# Altium PCB PCB1.PcbDoc
Units mm, origin at the board's own origin, x right, y up, seen from the top; angles counter-clockwise.
Board outline 95 x 95 mm, 2 copper layers (Top Layer, Bottom Layer); 46 components, 41 nets, 164 pads, 43 vias.
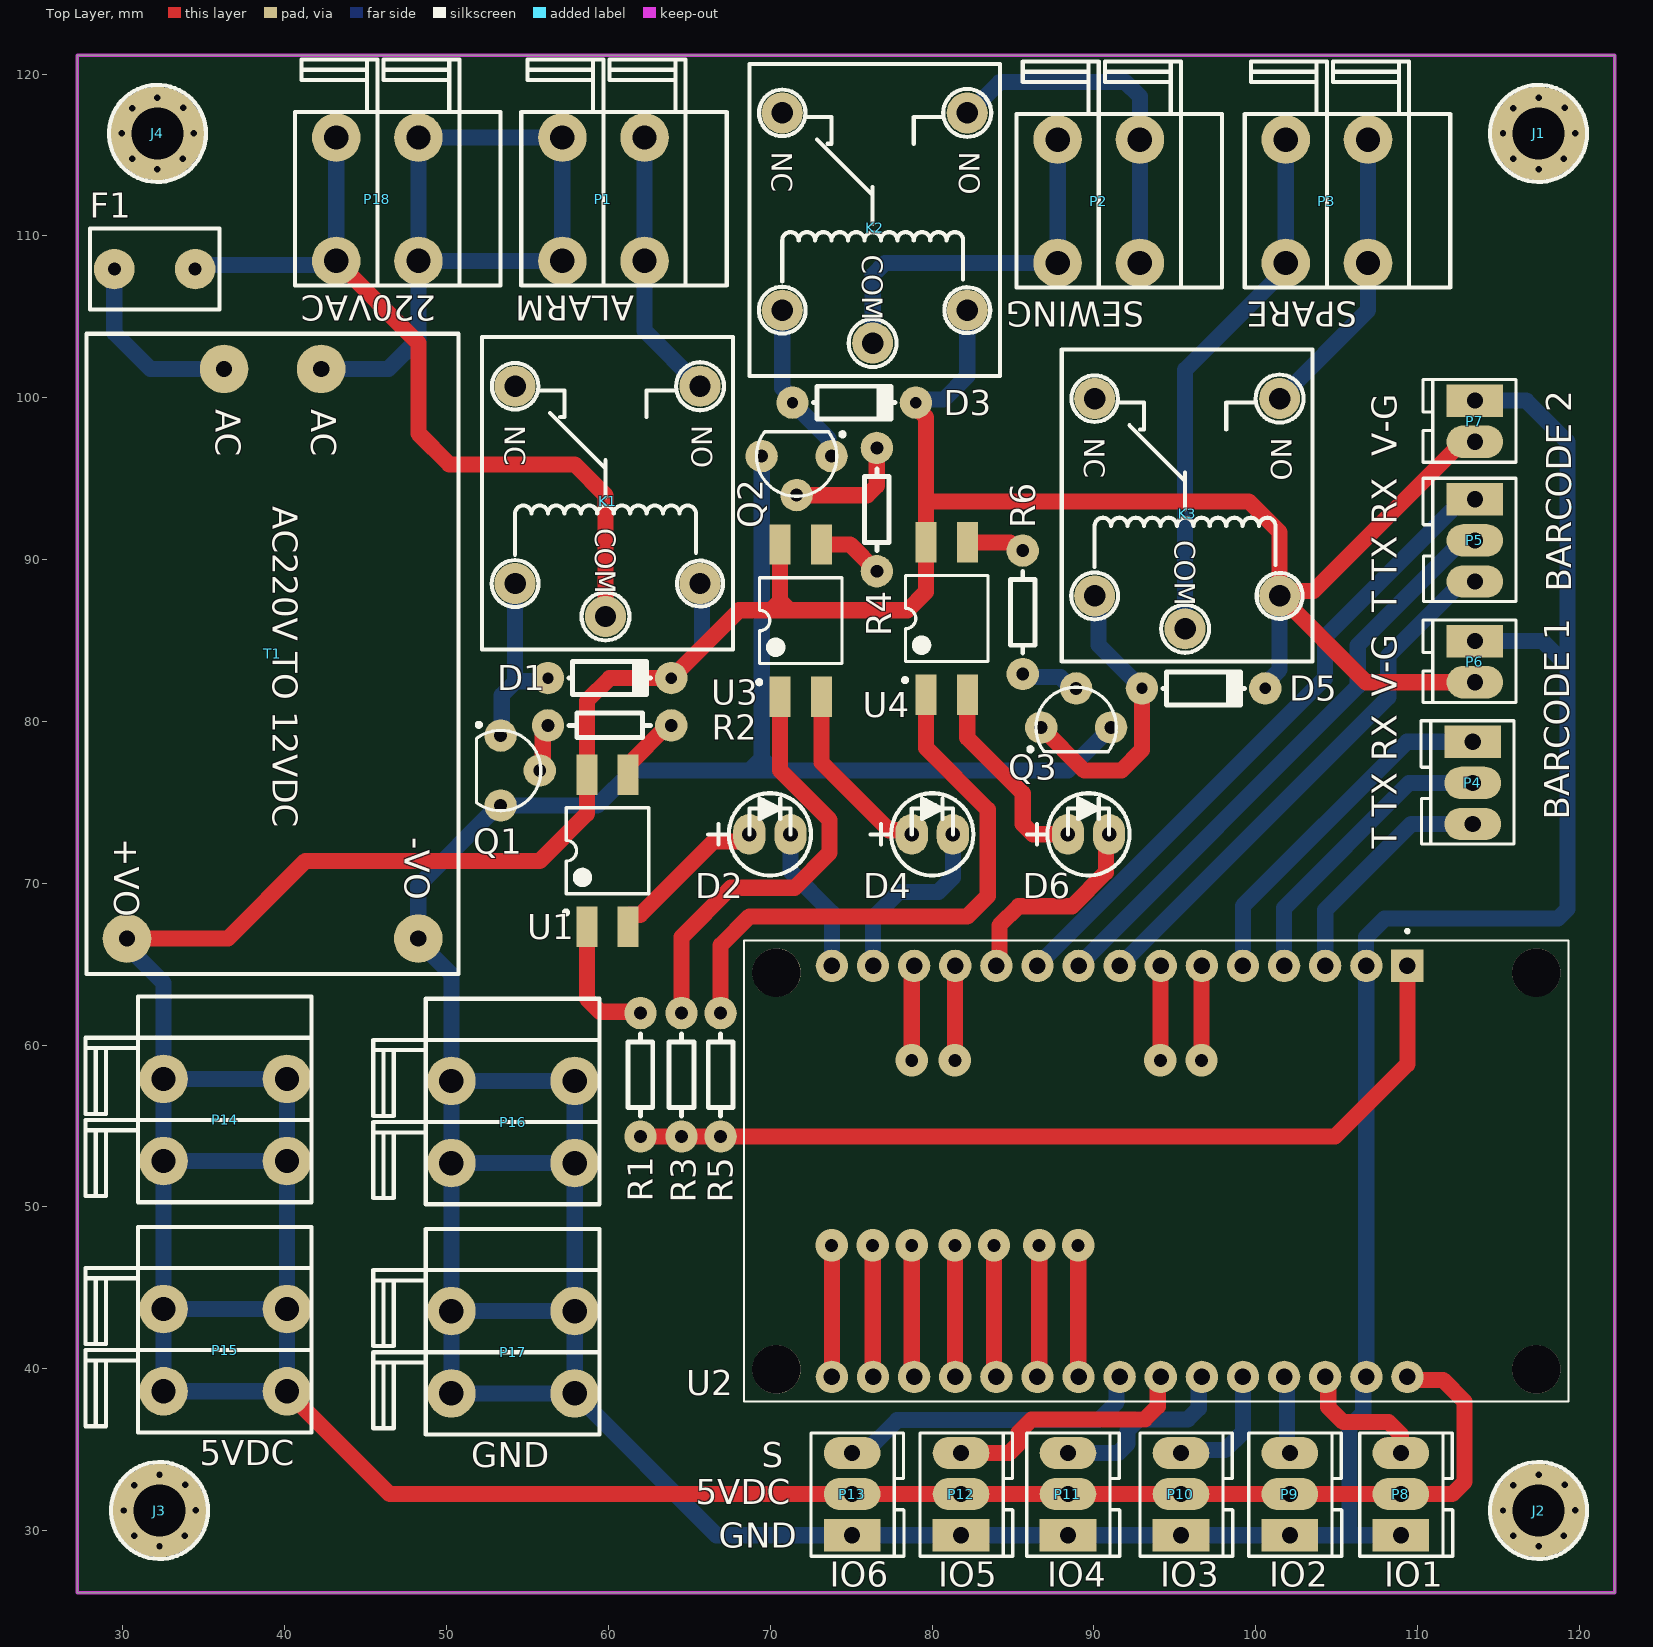
[diagram p0: Top Layer view]
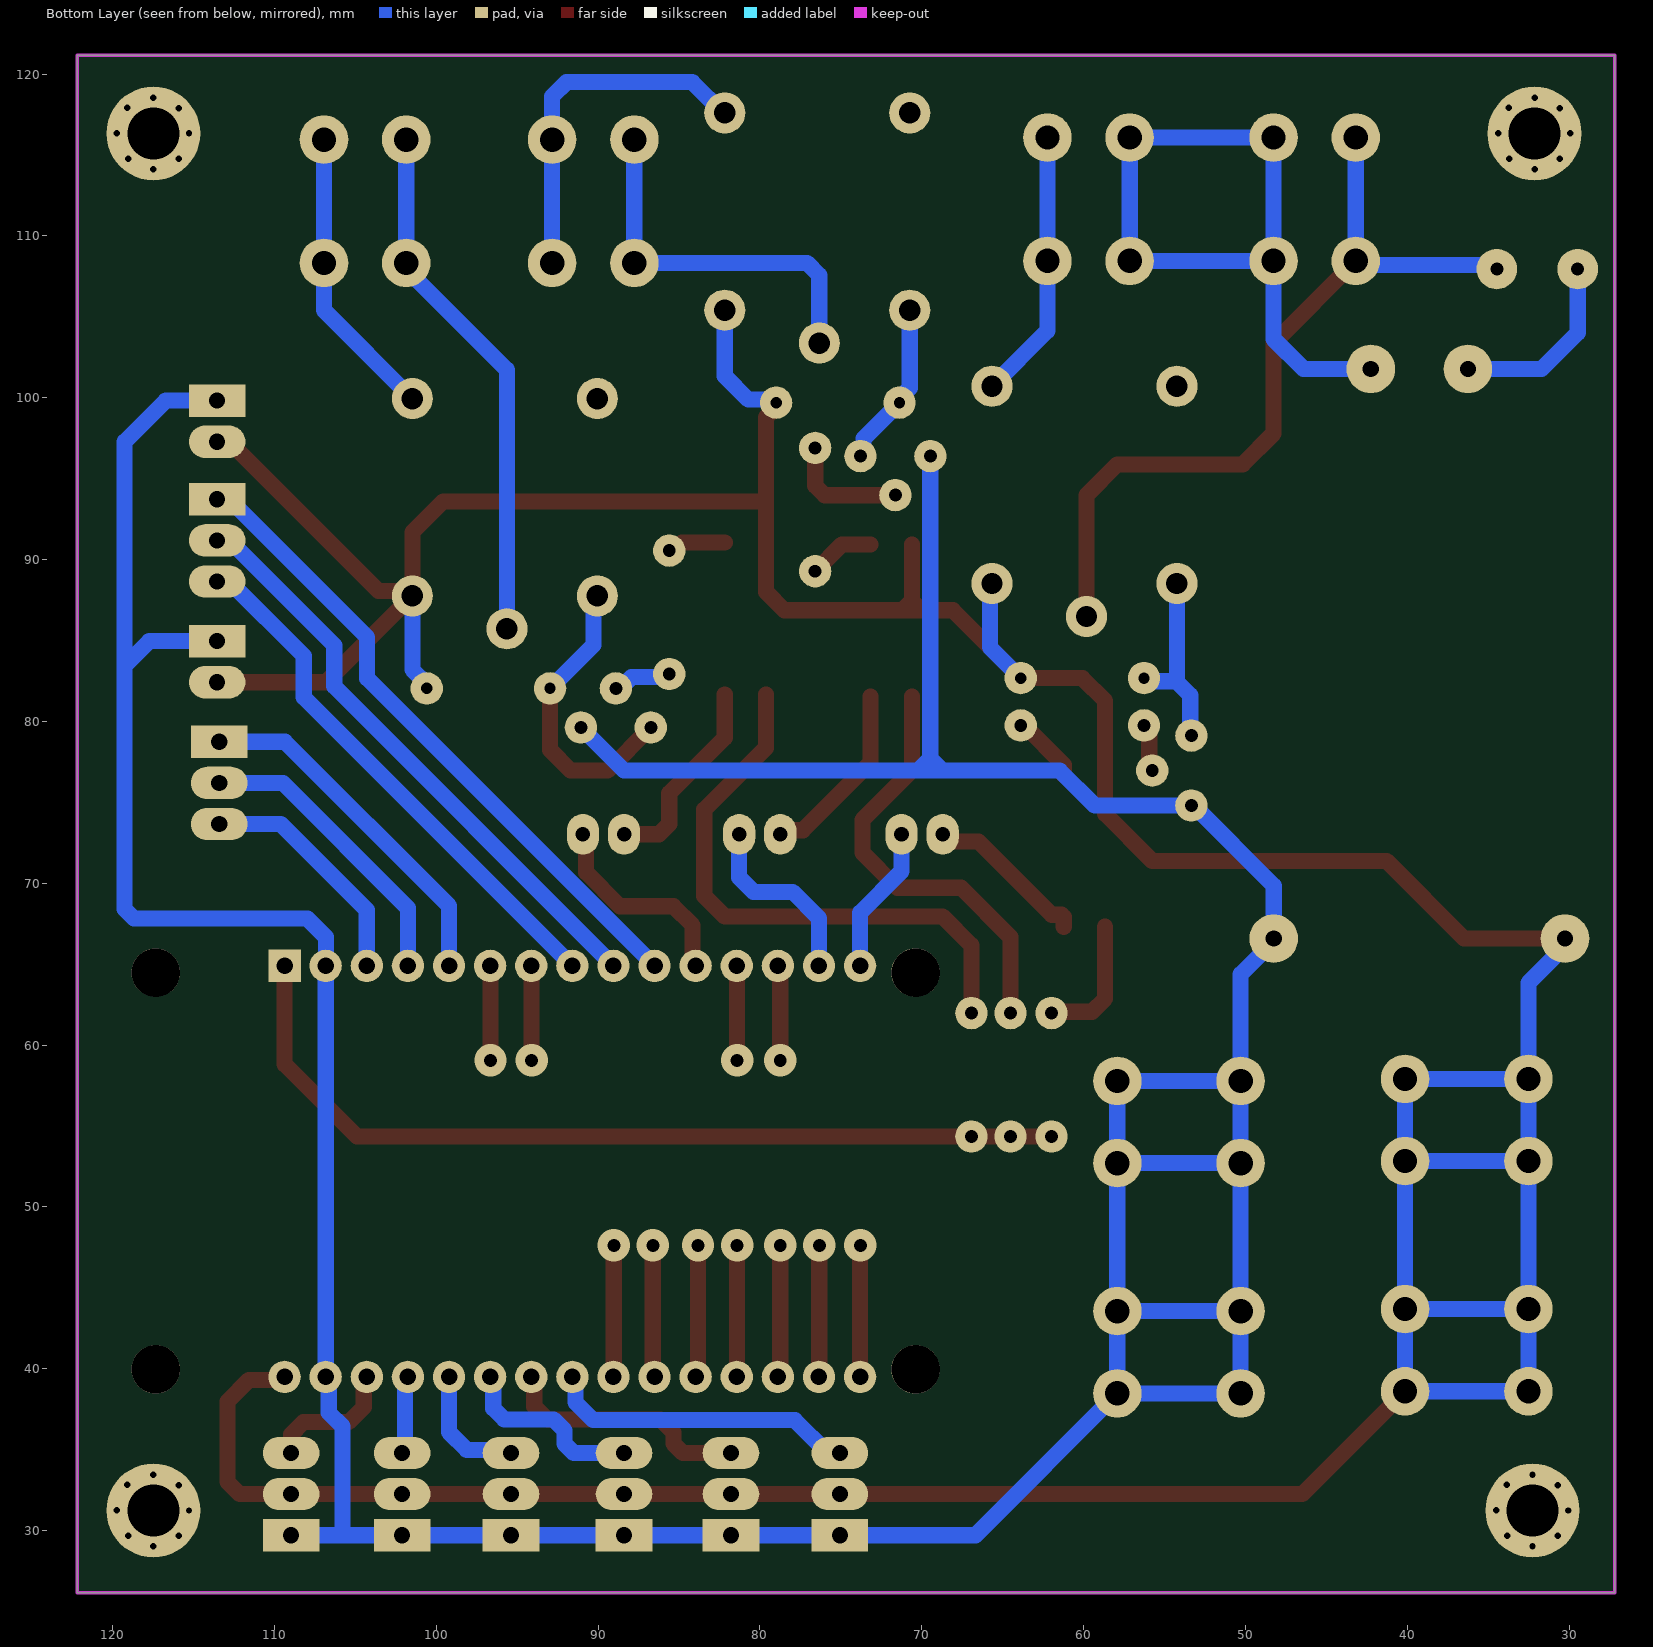
[diagram p1: Bottom Layer view, seen from below]
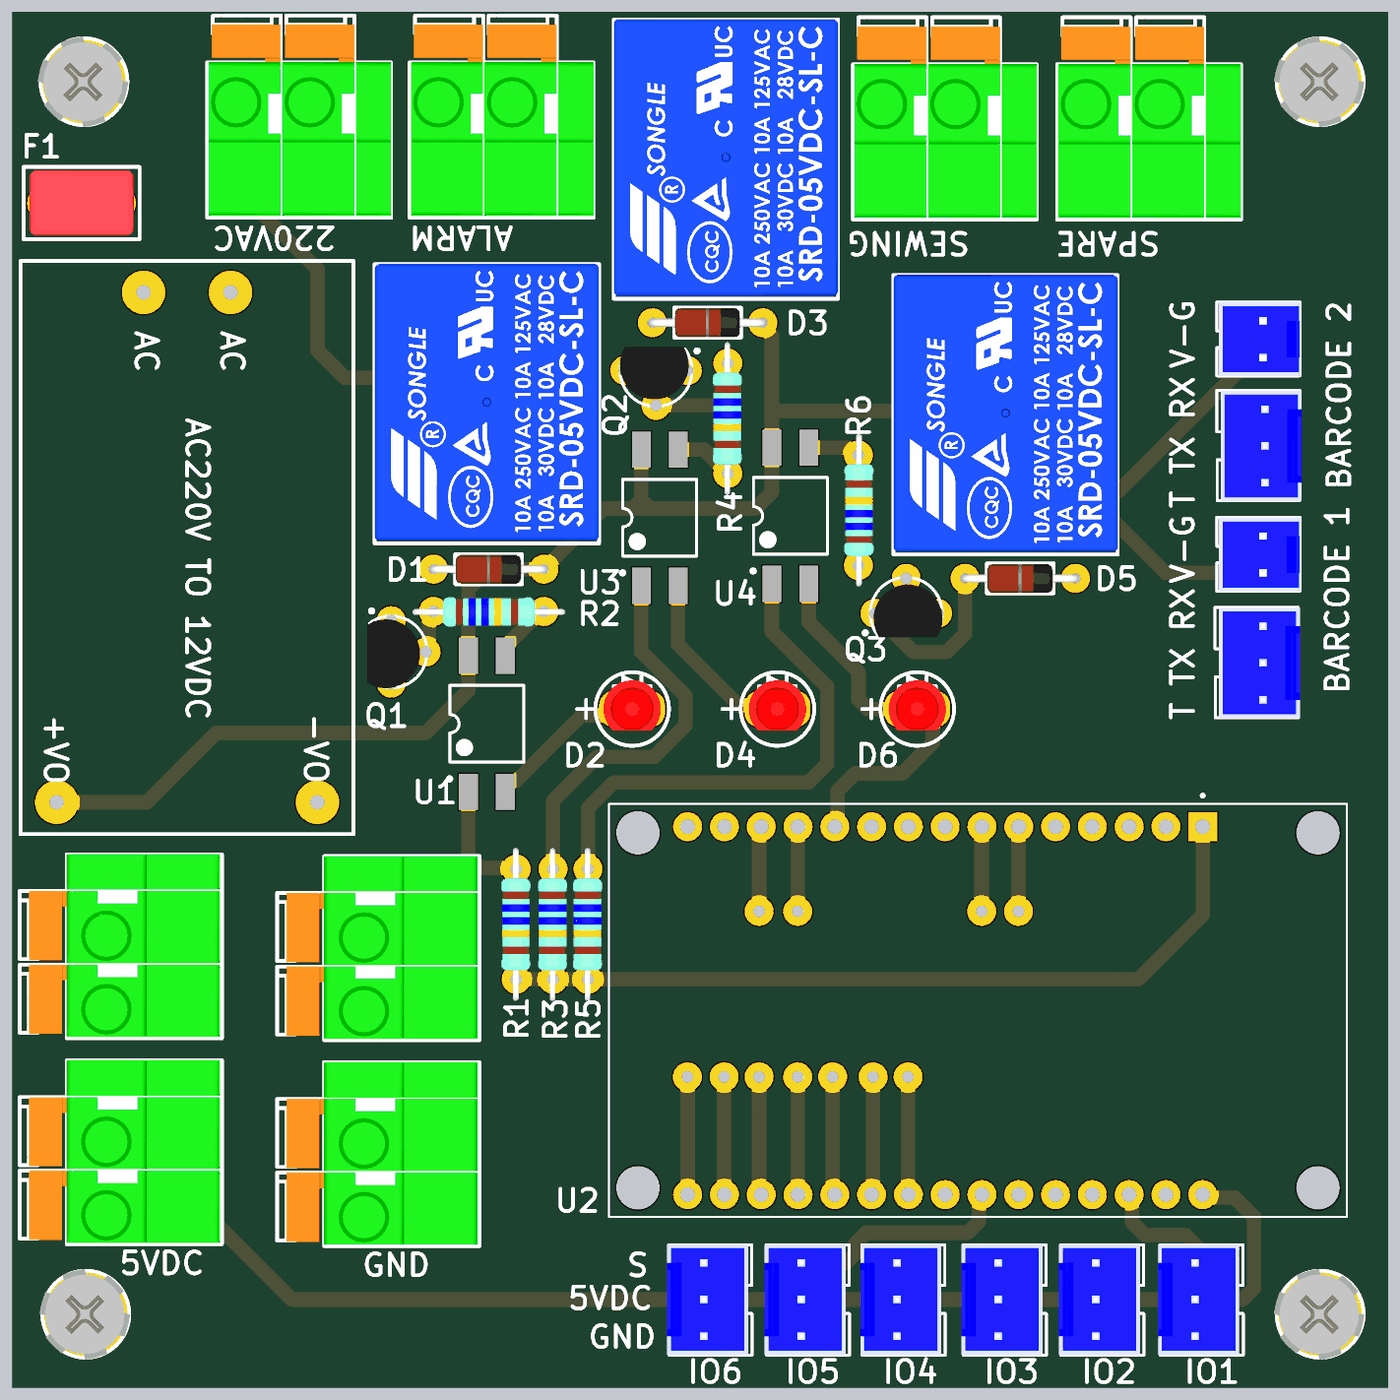
[diagram p2: 3D render of the assembled board from above, using the file's embedded part models]

## Layer stack, top to bottom
Top Solder: solder mask 0.0102, Solder Resist, Dk 3.5
Top Layer: signal copper 0.0356
Dielectric 1: dielectric 0.32, FR-4, Dk 4.8
Bottom Layer: signal copper 0.0356
Bottom Solder: solder mask 0.0102, Solder Resist, Dk 3.5

## Board outline
27.178,26.162 27.178,121.162 122.178,121.162 122.178,26.162

## Design rules (kind name [scope] priority, off if disabled: settings)
Clearance [All] p1: gap=0.254 ignorepadtopadclearanceinfootprint=FALSE except(0: Arc-Hole Track-Hole SMDPad-Hole THPad-Hole Via-Hole Fill-Hole Poly-Hole Region-Hole Text-Hole)
PolygonConnect [All] p1: connectstyle=Relief reliefconductorwidth=0.254 reliefentries=4 polygonreliefangle="90 Angle" airgapwidth=0.254
RoutingVias [All] p1: holewidth=0.711 width=1.27 viastyle="Through Hole" minholewidth=0.711 minwidth=1.27 maxholewidth=0.711 maxwidth=1.27
SolderMaskExpansion [All] p1: expansion=0.102 istentingtop=FALSE
Width [All] p1: maxlimit=1 minlimit=0.254 preferedwidth=0.6 minimp=50.000000 maximp=50.000000 favimp=50.000000
30 further rules are at their usual default settings.

## Components (designator, comment, footprint, x,y, rotation, side; value= is the part's Value field where it differs from the comment)
D1 "1N4148" D4148 56.261,82.677 r180 top
D2 "DO1" LED 69.977,73.025 r0 top
D3 "1N4148" D4148 71.374,99.695 r180 top
D4 "DO2" LED 80.01,73.025 r0 top
D5 "1N4148" D4148 92.964,82.042 r180 top
D6 "DO3" LED 89.662,73.025 r0 top
F1 "1A" CAP5W 34.464,107.92 r0 top
J1 "M3" PAD 117.475,116.332 r0 top
J2 "M3" PAD 117.475,31.242 r0 top
J3 "M3" PAD 32.258,31.242 r0 top
J4 "M3" PAD 32.131,116.332 r0 top
K1 "Relay" RELAY1CON_REV 59.817,86.487 r270 top
K2 "Relay" RELAY1CON_REV 76.327,103.378 r270 top
K3 "Relay" RELAY1CON_REV 95.631,85.725 r270 top
P1 "ALARM" KF142V-5.08-P2 62.23,116.078 r180 top
P2 "SEWING" KF142V-5.08-P2 92.837,115.951 r180 top
P3 "SPARE" KF142V-5.08-P2 106.934,115.951 r180 top
P4 "" CONNECT_2.54_(3) 113.411,78.74 r270 top
P5 "" CONNECT_2.54_(3) 113.538,93.726 r270 top
P6 "BARCODE1" CONNECT_2.54_(2) 113.538,84.963 r270 top
P7 "BARCODE2" CONNECT_2.54_(2) 113.538,99.822 r270 top
P8 "DI1" CONNECT_2.54_(3) 108.966,29.718 r90 top
P9 "DI1" CONNECT_2.54_(3) 102.108,29.718 r90 top
P10 "DI1" CONNECT_2.54_(3) 95.377,29.718 r90 top
P11 "DI1" CONNECT_2.54_(3) 88.392,29.718 r90 top
P12 "DI1" CONNECT_2.54_(3) 81.788,29.718 r90 top
P13 "DI1" CONNECT_2.54_(3) 75.057,29.718 r90 top
P14 "5VDC" KF142V-5.08-P2 32.512,57.912 r270 top
P15 "" KF142V-5.08-P2 32.512,43.688 r270 top
P16 "GND" KF142V-5.08-P2 50.292,57.785 r270 top
P17 "" KF142V-5.08-P2 50.292,43.561 r270 top
P18 "220VAC" KF142V-5.08-P2 48.26,116.078 r180 top
Q1 "BC547" TO-92 53.34,76.962 r180 top
Q2 "BC547" TO-92 71.628,96.393 r90 top
Q3 "BC547" TO-92 88.9,79.629 r270 top
R1 "100" R1/8 61.976,61.976 r270 top value=1K
R2 "500" R1/8 56.261,79.756 r0 top value=1K
R3 "100" R1/8 64.516,61.976 r270 top value=1K
R4 "500" R1/8 76.581,96.901 r270 top value=1K
R5 "100" R1/8 66.929,61.976 r270 top value=1K
R6 "500" R1/8 85.598,82.931 r90 top value=1K
T1 "AC-DC" AC-DC 39.243,84.582 r270 top
U1 "Optoisolator1" "DIP-4 - TOP" 59.944,72.009 r90 top
U2 "ESP32-DEVKIT-V1" ESP32_DEVKIT_V1 93.853,52.197 r270 top
U3 "Optoisolator1" "DIP-4 - TOP" 71.882,86.233 r90 top
U4 "Optoisolator1" "DIP-4 - TOP" 80.899,86.36 r90 top

## Footprints (in the part's own frame and the unit in brackets; to place one, negate y for a bottom-side part, rotate by r counter-clockwise, add the part's x,y. Pads: shape width x height; smd on the part's side, far side on the other; paste and mask are expansions set on the pad)
AC-DC [mm]
  round 3 hole 1: 1(-17.2,3.007) 2(-17.2,-2.993) 3(18,9.007) 4(18,-8.993)
  silkscreen extent -19.38,-11.5 20.2,11.5
CAP5W [mm]
  round 2.5 hole 0.8: 1(0,0.03) 2(-5,0.03)
  silkscreen extent -6.5,-2.47 1.5,2.53, body extent -6.1,-2.2 1.1,2.3, height 5.75
CONNECT_2.54_(2) [mm]
  rect 2x3.5 hole 1: 1(0,0)
  oval 2x3.5 hole 1: 2(2.54,0)
  silkscreen extent -1.3,-3.2 3.8,2.54, body extent -1.27,-3.05 3.81,2.54, height 10.26
CONNECT_2.54_(3) [mm]
  rect 2x3.5 hole 1: 1(0,0)
  oval 2x3.5 hole 1: 2(2.54,0) 3(5.08,0)
  silkscreen extent -1.3,-3.2 6.32,2.54, body extent -1.27,-2.92 6.35,2.67, height 12.04
D4148 [mm]
  round 2 hole 0.7: A(0,0) K(-7.62,0)
  silkscreen extent -6.32,-1.02 -1.3,1.02, body extent -7.88,-1 0.28,1, height 2.09
"DIP-4 - TOP" [mm] "DIP; 4 Leads; Row Spacing 7.62 mm; Pitch 2.54 mm"
  rect 2.5x1.3 smd: 1(-4.7,1.275) 2(-4.7,-1.275) 3(4.7,-1.275) 4(4.7,1.275)
  silkscreen extent -3.93,-2.55 2.65,2.69, body extent -3.15,-2.5 3.15,2.5, height 5.6
ESP32_DEVKIT_V1 [mm]
  rect 2x2 / inner round 2 / far side rect 2x2 hole 1.02: 1(-12.7,15.515)
  round 2 hole 1.02: 2(-12.7,12.975) 3(-12.7,10.435) 4(-12.7,7.895) 5(-12.7,5.355) 6(-12.7,2.815) 7(-12.7,0.275) 8(-12.7,-2.265) 9(-12.7,-4.805) 10(-12.7,-7.345) 11(-12.7,-9.885) 12(-12.7,-12.425) 13(-12.7,-14.965) 14(-12.7,-17.505) 15(-12.7,-20.045) 16(12.7,-20.045) 17(12.7,-17.505) 18(12.7,-14.965) 19(12.7,-12.425) 20(12.7,-9.885) 21(12.7,-7.345) 22(12.7,-4.805) 23(12.7,-2.265) 24(12.7,0.275) 25(12.7,2.815) 26(12.7,5.355) 27(12.7,7.895) 28(12.7,10.435) 29(12.7,12.975) 30(12.7,15.515)
  round 3 hole 3 unplated: ""(-12.28,23.475) ""(-12.28,-23.475) ""(12.23,23.475) ""(12.23,-23.475)
  silkscreen extent -14.95,-25.48 14.23,25.48
KF142V-5.08-P2 [mm]
  round 3 hole 1.5: 1(0,7.62) 1(0,0) 2(5.08,7.62) 2(5.08,0)
  silkscreen extent -5.08,-4.83 7.62,9.14, body extent -5.08,-4.18 7.52,9.02, height 14.1
LED [mm]
  oval 2x2.5 hole 0.9: 1(-1.27,0) 2(1.27,0)
  silkscreen extent -3.81,-2.54 2.54,2.54, body extent -1.99,-1.5 1.99,1.99, height 5.38
PAD [mm]
  round 5.8 hole 3.2: 0(0,0)
  silkscreen extent -3,-3 3,3, body extent -4.38,-4.32 4.25,4.31, height 1
R1/8 [mm]
  round 2 hole 0.8: 1(0,0) 2(7.62,0)
  silkscreen extent 1.3,-0.76 6.35,0.76, body extent -1.46,-1.05 9.11,0.98, height 2.29
RELAY1CON_REV [mil]
  round 100 hole 52: 1(0,0) 2(-560,-220) 3(-560,230) 4(-80,230) 5(-80,-220)
  silkscreen extent -679,-300 80,310, body extent -680,-300 72,310, height 606
TO-92 [mm]
  round 2 hole 0.8: 1(0,-2.159) 2(-2.413,0) 3(0,2.159)
  silkscreen extent -2.48,-2.95 1.5,2.48, body extent -2,-2.25 1.65,2.51, height 7.62

## Part data
D1 D3 D5: library part Diode, "Default Diode", Code_JEDEC=DO-214-AB, LatestRevisionDate=17-Jul-2002, LatestRevisionNote="Re-released for DXP Platform.", PackageDescription="DO-214-AB/SMC; 2 C-Bend Leads; Body 7.9 x 5.9 mm, inc. leads (LxW)", PackageReference=SMC, PackageVersion=Sep-1996, Published=8-Jun-2000, Publisher="Altium Limited"
D2 D4 D6: library part LED0, "Typical INFRARED GaAs LED", LatestRevisionDate=08-Jul-2005, LatestRevisionNote="Mech Layer 1 removed.", PackageDescription="LED; 2 Leads", PackageReference=LED-0, Published=8-Jun-2000, Publisher="Altium Limited"
F1: library part "Fuse 2", "Fuse", LatestRevisionDate=17-Jul-2002, LatestRevisionNote="Re-released for DXP Platform.", PackageDescription="Thru-Hole; 2 Leads", PackageReference=PIN-W2/E2.8, Published=8-Jun-2000, Publisher="Altium Limited"
J1 J2 J3 J4: library part Socket, "Socket", LatestRevisionDate=17-Jul-2002, LatestRevisionNote="Re-released for DXP Platform.", Publisher="Altium Limited"
K1 K2 K3: "SPDT Relay", LatestRevisionDate=17-Jul-2002, LatestRevisionNote="Re-released for DXP Platform.", PackageReference=MODULE5B, Published=8-Jun-2000, Publisher="Altium Limited"
P1 P2 P3 P6 P7 P14 P15 P16 P17 P18: library part "Header 2", "Header, 2-Pin", LatestRevisionDate=17-Jul-2002, LatestRevisionNote="Re-released for DXP Platform.", Publisher="Altium Limited"
P4 P5 P8 P9 P10 P11 P12 P13: library part "Header 3", "Header, 3-Pin", LatestRevisionDate=17-Jul-2002, LatestRevisionNote="Re-released for DXP Platform.", Publisher="Altium Limited"
Q1 Q2 Q3: library part 2N3904, "NPN General Purpose Amplifier", ComponentLink1Description="Manufacturer Link", ComponentLink1URL=http://www.fairchildsemi.com/, ComponentLink2Description=Datasheet, ComponentLink2URL=http://www.fairchildsemi.com/ds/2N%2F2N3904.pdf, DatasheetVersion=1997, LatestRevisionDate=15-Jan-2003, LatestRevisionNote="PCB Footprint 'BCY-W3/D4.7' replaced", PackageDescription="TO, Flat Index; 3 In-Line, Axial Leads; Body Dia. 4.5mm; Leads 0.51 x 0.48 mm (max)", PackageReference=TO-92A, PackageVersion=Sep-1998, Published=8-Jun-2000, Publisher="Altium Limited"
R1 R2 R3 R4 R5 R6: library part Res1, "Resistor", LatestRevisionDate=17-Jul-2002, LatestRevisionNote="Re-released for DXP Platform.", PackageDescription="Axial Device, Thru-Hole; 2 Leads; 0.3 in Pin Spacing", PackageReference=AXIAL-0.3, Published=8-Jun-2000, Publisher="Altium Limited"
T1: library part Trans, "Transformer", LatestRevisionDate=08-Jul-2005, LatestRevisionNote="Mech Layer 1 removed.", PackageDescription="Transformer; 4 Leads", PackageReference=TRANS, Published=24-Mar-1999, Publisher="Altium Limited"
U1 U3 U4: "4-Pin Phototransistor Optocoupler", DatasheetVersion=Nov-2003, LatestRevisionDate=04-Mar-2005, LatestRevisionNote="Sch pins 3 & 4 Swapped.", PackageReference=DIP-4, Published=24-Mar-1999, Publisher="Altium Limited"
U2: "Dual core, Wi-Fi: 2.4 GHz up to 150 Mbits/s,BLE (Bluetooth Low Energy) and legacy Bluetooth, 32 bits, Up to 240 MHz"

## Via types
v1: diameter 1, hole 0.4, Top Layer to Bottom Layer, 32 vias
v2: diameter 2, hole 0.8, Top Layer to Bottom Layer, 11 vias

## Nets (pads, with @x,y where several pads share a name; then routed paths per layer and width w, separated by ;. In a path a pad name is that pad's centre, name@x,y a point inside that pad or via, vN(x,y) a via of type N, cw(c..) or ccw(c..) an arc to the next point about the centre after c; other vN are vias at no path point)
3V3: R1.2 R3.2 R5.2 U2.1 | length 55.3
  Top Layer w1: R1.2 R3.2 R5.2 104.902,54.356 109.368,58.822 U2.1
5V: D1.K D3.K D5.K K1.4 K2.4 K3.4 P6.2 P7.2 P8.2 P9.2 P10.2 P11.2 P12.2 P13.2 P14.1 P14.2 P15.1 P15.2 T1.4 U1.4 U2.30 U3.4 U4.4 | length 320.5
  Top Layer w1: T1.4 36.483,66.582 41.275,71.374 55.753,71.374 58.669,74.29 58.669,81.275 60.071,82.677 D1.K 68.072,86.868 70.021,86.868 ; P15.2@40.132,38.608 46.482,32.258 P13.2 P12.2 P11.2 P10.2 P9.2 P8.2 112.141,32.258 112.903,33.02 112.903,37.973 111.57,39.306 109.559,39.306 U2.30 ; U3.4 70.607,87.454 ; D3.K 78.994,99.424 79.624,98.794 79.624,93.599 ; P6.2 106.807,82.423 K3.4 ; P7.2 112.788,97.282 103.558,88.052 101.768,88.052 K3.4 ; 70.021,86.868 71.193,86.868 ; 70.021,86.868 70.607,87.454 ; 70.607,87.454 71.193,86.868 ; 71.193,86.868 78.486,86.868 79.624,88.006 U4.4 79.624,93.599 ; 79.624,93.599 99.568,93.599 101.473,91.694 K3.4
  Bottom Layer w1: T1.4 30.25,66.099 32.512,63.836 P14.1@32.512,57.912 ; D1.K 65.786,84.582 65.786,88.392 K1.4 ; D3.K 79.185,99.886 80.709,99.886 82.169,101.346 K2.4 ; D5.K 100.584,82.313 101.473,83.202 K3.4 ; P15.1@32.512,43.688 P15.1@40.132,43.688 ; P15.1@32.512,43.688 P14.2@32.512,52.832 ; P15.1@32.512,43.688 32.512,38.608 40.132,38.608 P15.1@40.132,43.688 ; P14.2@32.512,52.832 P14.2@40.132,52.832 ; P14.2@32.512,52.832 P14.1@32.512,57.912 ; P14.1@32.512,57.912 40.132,57.912 P14.2@40.132,52.832 ; P15.1@40.132,43.688 P14.2@40.132,52.832
alarm: D2.2 U2.15 | length 9.2
  Bottom Layer w1: D2.2 71.247,70.739 73.808,68.178 U2.15
cutoff_sewing: D4.2 U2.14 | length 11.6
  Bottom Layer w1: U2.14 76.348,67.839 77.978,69.469 80.391,69.469 81.28,70.358 D4.2
DO_SPARE: D6.2 U2.11 | length 12.9
  Top Layer w1: U2.11 84.159,65.088 84.159,67.395 85.344,68.58 88.646,68.58 90.741,70.675 90.741,72.834 D6.2
GND: P6.1 P7.1 P8.1 P9.1 P10.1 P11.1 P12.1 P13.1 P16.1 P16.2 P17.1 P17.2 Q1.3 Q2.3 Q3.3 T1.3 U2.2 U2.29 | length 296.9
  Bottom Layer w1: Q2.3 69.469,77.724 ; Q3.3 88.392,76.962 70.231,76.962 ; P8.1 105.791,29.718 ; P6.1 117.729,84.963 119.253,83.439 ; P7.1 116.713,99.822 119.253,97.282 119.253,83.439 ; P17.1@50.292,43.561 P17.1@57.912,43.561 ; P17.1@50.292,43.561 P16.2@50.292,52.705 ; P17.1@50.292,43.561 50.292,38.481 P17.2@57.912,38.481 ; P16.2@50.292,52.705 P16.2@57.912,52.705 ; P16.2@50.292,52.705 P16.1@50.292,57.785 ; P16.1@50.292,57.785 57.912,57.785 P16.2@57.912,52.705 ; P16.1@50.292,57.785 50.292,64.382 48.25,66.424 T1.3 48.25,69.85 53.203,74.803 Q1.3 59.309,74.803 61.468,76.962 68.707,76.962 ; P17.2@57.912,38.481 66.675,29.718 P13.1 P12.1 P11.1 P10.1 P9.1 105.791,29.718 ; P17.2@57.912,38.481 P17.1@57.912,43.561 ; P17.1@57.912,43.561 P16.2@57.912,52.705 ; 68.707,76.962 70.231,76.962 ; 68.707,76.962 69.469,77.724 ; 69.469,77.724 70.231,76.962 ; 105.791,29.718 105.791,36.449 106.637,37.295 106.637,39.306 U2.29 U2.2 106.807,64.918 106.807,66.675 107.95,67.818 118.667,67.818 119.253,68.404 119.253,83.439
IO1: P8.3 U2.28 | length 9.5
  Top Layer w1: U2.28 104.479,39.306 104.479,37.634 105.41,36.703 108.204,36.703 108.966,35.941 108.966,35.052 109.093,34.925 P8.3 108.487,34.798 P8.3@108.025,35.26
IO2: P9.3 U2.27 | length 4.8
  Bottom Layer w1: U2.27 101.928,39.317 101.928,34.978 P9.3
IO3: P10.3 U2.26 | length 7.8
  Bottom Layer w1: P10.3 95.568,34.989 98.108,34.989 99.208,36.089 U2.26
IO4: P11.3 U2.25 | length 11.7
  Bottom Layer w1: P11.3 91.504,34.798 92.075,35.369 92.075,36.195 92.752,36.872 95.8,36.872 96.477,37.549 96.477,39.306 U2.25
IO5: P12.3 U2.24 | length 15.6
  Top Layer w1: P12.3 84.758,34.798 85.344,35.384 85.344,36.068 86.148,36.872 93.133,36.872 93.937,37.676 93.937,39.306 U2.24
IO6: P13.3 U2.23 | length 19.3
  Bottom Layer w1: P13.3 75.807,34.798 77.839,36.83 90.297,36.83 91.397,37.93 91.397,39.306 U2.23
L: F1.1 K1.1 P18.2 | length 49.9
  Top Layer w1: P18.2@43.18,108.458 48.26,103.378 48.26,97.79 50.165,95.885 57.912,95.885 59.817,93.98 K1.1
  Bottom Layer w1: F1.1 34.718,108.204 42.926,108.204 43.18,108.458 P18.2@43.18,116.078
N: P1.2 P18.1 T1.1 | length 44.6
  Bottom Layer w1: T1.1 46.41,101.782 48.26,103.632 P18.1@48.26,108.458 ; P18.1@48.26,108.458 57.15,108.458 57.15,116.078 48.26,116.078 P18.1@48.26,108.458
NetD1_A: D1.A K1.5 Q1.1 | length 12.2
  Bottom Layer w1: Q1.1 53.41,79.191 53.41,81.621 54.229,82.44 ; K1.5 54.229,82.44 ; D1.A@55.99,82.677 D1.A 56.07,82.486 54.275,82.486 54.229,82.44
NetD2_1: D2.1 U1.2 | length 10.2
  Top Layer w1: U1.2 61.219,67.909 61.369,68.059 61.969,68.059 66.494,72.584 68.266,72.584 D2.1
NetD3_A: D3.A K2.5 Q2.1 | length 10.3
  Bottom Layer w1: K2.5 70.739,100.601 71.374,99.966 D3.A 73.596,97.473 73.596,96.584 Q2.1
NetD4_1: D4.1 U3.2 | length 11.5
  Top Layer w1: U3.2 73.157,77.465 77.343,73.279 78.486,73.279 D4.1
NetD5_A: D5.A K3.5 Q3.1 | length 18.6
  Top Layer w1: Q3.1 89.408,76.962 91.694,76.962 92.964,78.232 D5.A
  Bottom Layer w1: K3.5 90.29,87.51 90.29,84.716 D5.A
NetD6_1: D6.1 U4.2 | length 13.1
  Top Layer w1: U4.2 82.174,78.989 85.598,75.565 85.598,73.66 86.233,73.025 D6.1 D6.1@87.951,73.466
NetF1_2: F1.2 T1.2 | length 11.6
  Bottom Layer w1: F1.2 29.464,104.013 31.695,101.782 T1.2
NetK1_3: K1.3 P1.1 | length 16.8
  Bottom Layer w1: P1.1@62.23,116.078 62.23,108.458 62.23,104.14 K1.3
NetK2_1: K2.1 P2.2 | length 23.6
  Bottom Layer w1: K2.1 76.327,107.569 77.089,108.331 87.757,108.331 P2.2@87.757,115.951
NetK2_3: K2.3 P2.1 | length 22.1
  Bottom Layer w1: K2.3 82.276,117.602 84.181,119.507 91.948,119.507 92.837,118.618 92.837,115.951 P2.1@92.837,108.331
NetK3_1: K3.1 P3.2 | length 32.8
  Bottom Layer w1: K3.1 95.631,101.727 101.854,107.95 101.854,108.331 P3.2@101.854,115.951
NetK3_3: K3.3 P3.1 | length 18.3
  Bottom Layer w1: K3.3 106.934,105.41 106.934,108.331 P3.1@106.934,115.951
NetQ1_2: Q1.2 R2.1 | length 3
  Top Layer w1: Q1.2 55.944,77.153 55.944,79.169 56.261,79.485 R2.1
NetQ2_2: Q2.2 R4.1 | length 7.5
  Top Layer w1: Q2.2 75.995,93.98 76.581,94.566 R4.1
NetQ3_2: Q3.2 R6.1 | length 3.7
  Bottom Layer w1: R6.1 85.789,82.74 87.932,82.74 88.629,82.042 Q3.2
NetR1_1: R1.1 U1.1 | length 8.1
  Top Layer w1: U1.1 58.669,62.87 59.476,62.063 61.889,62.063 R1.1
NetR2_2: R2.2 U1.3 | length 4.3
  Top Layer w1: U1.3 61.219,77.309 63.666,79.756 R2.2
NetR3_1: R3.1 U3.1 | length 26.9
  Top Layer w1: R3.1 64.516,66.675 67.564,69.723 71.501,69.723 73.66,71.882 73.66,73.914 70.607,76.967 U3.1
NetR4_2: R4.2 U3.3 | length 4.1
  Top Layer w1: U3.3 74.929,90.933 R4.2
NetR5_1: R5.1 U4.1 | length 36
  Top Layer w1: R5.1 66.929,66.167 68.707,67.945 82.169,67.945 83.439,69.215 83.439,74.549 79.624,78.364 U4.1
NetR6_2: R6.2 U4.3 | length 3.6
  Top Layer w1: U4.3 84.818,91.06 85.327,90.551 R6.2
RX_BAR1: P4.1 U2.5 | length 22.1
  Bottom Layer w1: U2.5 99.208,68.601 109.347,78.74 P4.1
RX_BAR2: P5.1 U2.10 | length 40.5
  Bottom Layer w1: U2.10 104.267,82.656 104.267,85.205 112.788,93.726 P5.1
trig_barcode1: P4.3 U2.3 | length 14.8
  Bottom Layer w1: U2.3 104.288,68.347 109.601,73.66 P4.3
trig_barcode2: P5.3 U2.8 | length 33.3
  Bottom Layer w1: U2.8 108.188,81.497 108.188,84.046 112.788,88.646 P5.3
TX_BAR1: P4.2 U2.4 | length 18.4
  Bottom Layer w1: U2.4 101.748,68.474 109.474,76.2 P4.2
TX_BAR2: P5.2 U2.9 | length 36.9
  Bottom Layer w1: U2.9 89.048,64.918 106.299,82.169 106.299,84.697 112.788,91.186 P5.2
pads on no net: J1.0 J2.0 J3.0 J4.0 K1.2 K2.2 K3.2 U2. U2.6 U2.7 U2.12 U2.13 U2.16 U2.17 U2.18 U2.19 U2.20 U2.21 U2.22
copper on no net: | length 81.1
  Top Layer w1: 73.787,39.73 73.914,39.603 73.808,39.497 73.808,47.604 v2(73.787,47.625) ; v2(76.327,47.625) 76.327,39.518 76.348,39.497 76.454,39.603 ; v2(78.74,47.625) 78.74,39.645 78.888,39.497 78.867,39.518 ; v2(78.74,59.055) 78.74,64.749 78.888,64.897 ; v2(81.407,47.625) 81.407,39.518 81.428,39.497 ; v2(81.407,59.055) 81.407,64.876 81.428,64.897 ; v2(83.82,47.625) 83.82,39.645 83.968,39.497 ; 86.508,39.497 86.614,39.603 v2(86.614,47.625) ; v2(89.027,47.625) 89.027,39.518 89.048,39.497 ; v2(94.107,59.055) 94.107,64.876 94.128,64.897 ; v2(96.647,59.055) 96.647,64.876 96.668,64.897
  other v1: 32.258,29.042 117.475,29.042 30.702,29.686 33.814,29.686 115.919,29.686 119.031,29.686 30.058,31.242 115.275,31.242 34.508,31.267 119.725,31.267 30.702,32.798 115.919,32.798 33.864,32.823 119.081,32.823 32.258,33.442 117.475,33.442 32.131,114.132 117.475,114.132 30.575,114.776 33.687,114.776 115.919,114.776 119.031,114.776 29.931,116.332 115.275,116.332 34.381,116.357 119.725,116.357 30.575,117.888 115.919,117.888 33.737,117.913 119.081,117.913 32.131,118.532 117.475,118.532

## Keep-outs
Keep-Out Layer:
  the board outline again, w0.2

## Silkscreen, mask and mechanical layers (free items; w line width, h text height)
Top Overlay:
  text "V-G" at 108.712,96.393 h1.52 r90
  text "BARCODE 2" at 119.507,88.011 h1.52 r90
  text "T TX RX" at 108.712,86.741 h1.52 r90
  text "V-G" at 108.712,81.534 h1.52 r90
  text "BARCODE 1" at 119.38,73.914 h1.52 r90
  text "T TX RX" at 108.712,72.136 h1.52 r90
  text "S" at 69.469,33.909 h1.52
  text "5VDC" at 65.405,31.623 h1.52
  text "GND" at 66.802,28.956 h1.52
  text "IO6" at 73.66,26.543 h1.52
  text "IO5" at 80.391,26.543 h1.52
  text "IO4" at 87.122,26.543 h1.52
  text "IO3" at 94.107,26.543 h1.52
  text "IO2" at 100.838,26.543 h1.52
  text "IO1" at 107.95,26.543 h1.52

## Text inside footprints (layer, text, board x,y; h text height)
K1: Top Overlay "NO" at 65.151,98.298 h1.27 r270; Top Overlay "NC" at 53.594,98.298 h1.27 r270; Top Overlay "COM" at 59.182,91.948 h1.27 r270
K2: Top Overlay "NO" at 81.661,115.189 h1.27 r270; Top Overlay "NC" at 70.104,115.189 h1.27 r270; Top Overlay "COM" at 75.692,108.839 h1.27 r270
K3: Top Overlay "NO" at 100.965,97.536 h1.27 r270; Top Overlay "NC" at 89.408,97.536 h1.27 r270; Top Overlay "COM" at 94.996,91.186 h1.27 r270
T1: Top Overlay "AC220V TO 12VDC" at 39.243,93.282 h1.52 r270; Top Overlay "+VO" at 29.468,72.782 h1.52 r270; Top Overlay "-VO" at 47.418,72.857 h1.52 r270; Top Overlay "AC" at 35.725,99.282 h1.52 r270; Top Overlay "AC" at 41.65,99.282 h1.52 r270